# Altium PCB 5811-fail.PcbDoc
Units mm, origin at the board's own origin, x right, y up, seen from the top; angles counter-clockwise.
Board outline 50.17 x 30.35 mm, 4 copper layers (Top Layer, Internal Plane 1, Signal Layer 1, Bottom Layer), stack 0.925 mm thick; 83 components, 54 nets, 244 pads, 321 vias.
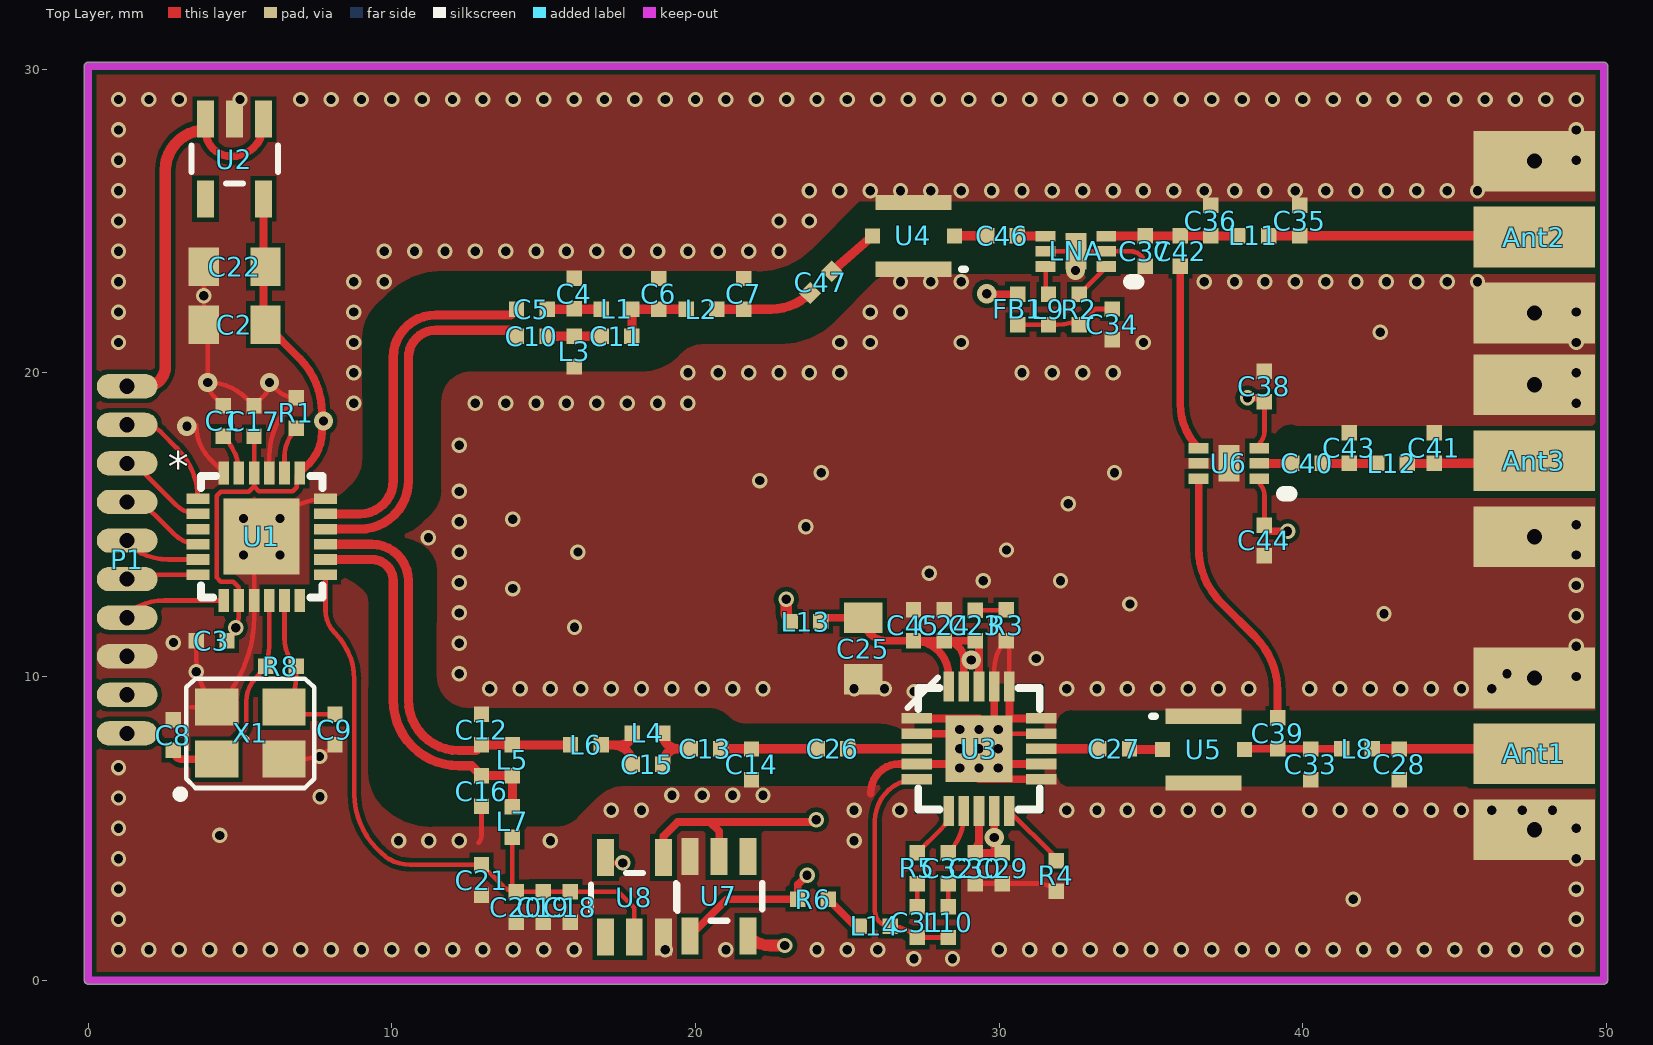
[diagram p0: Top Layer view]
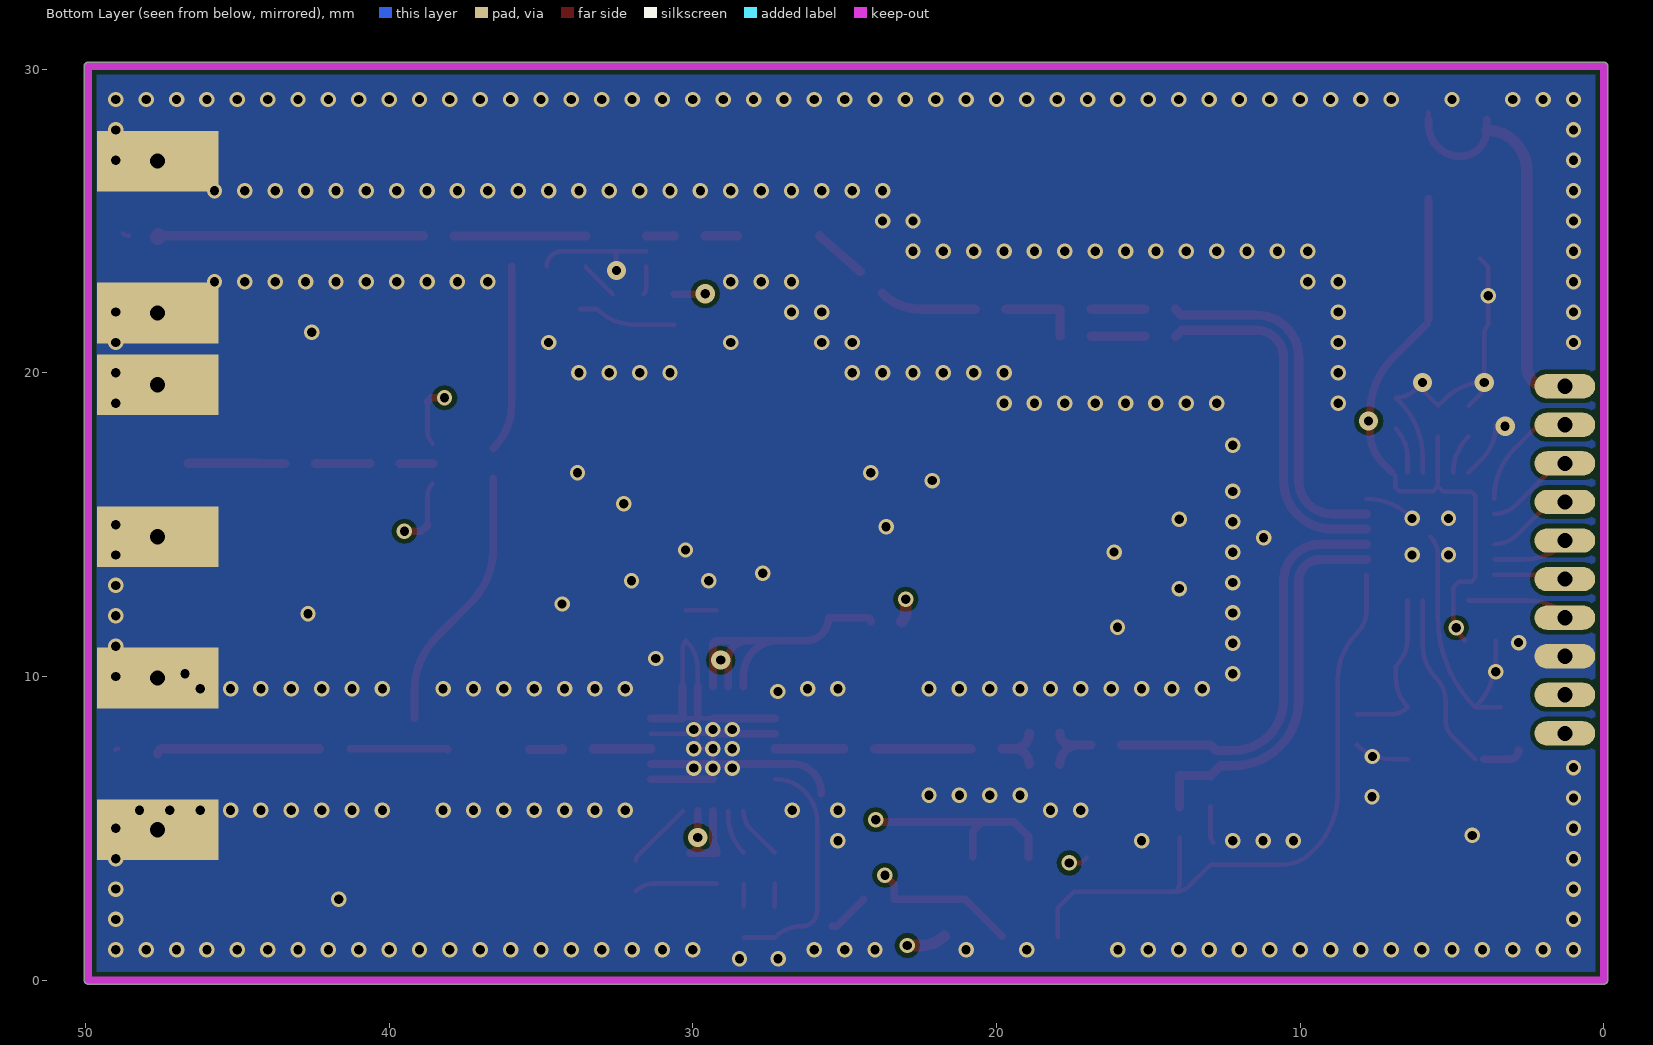
[diagram p1: Bottom Layer view, seen from below]
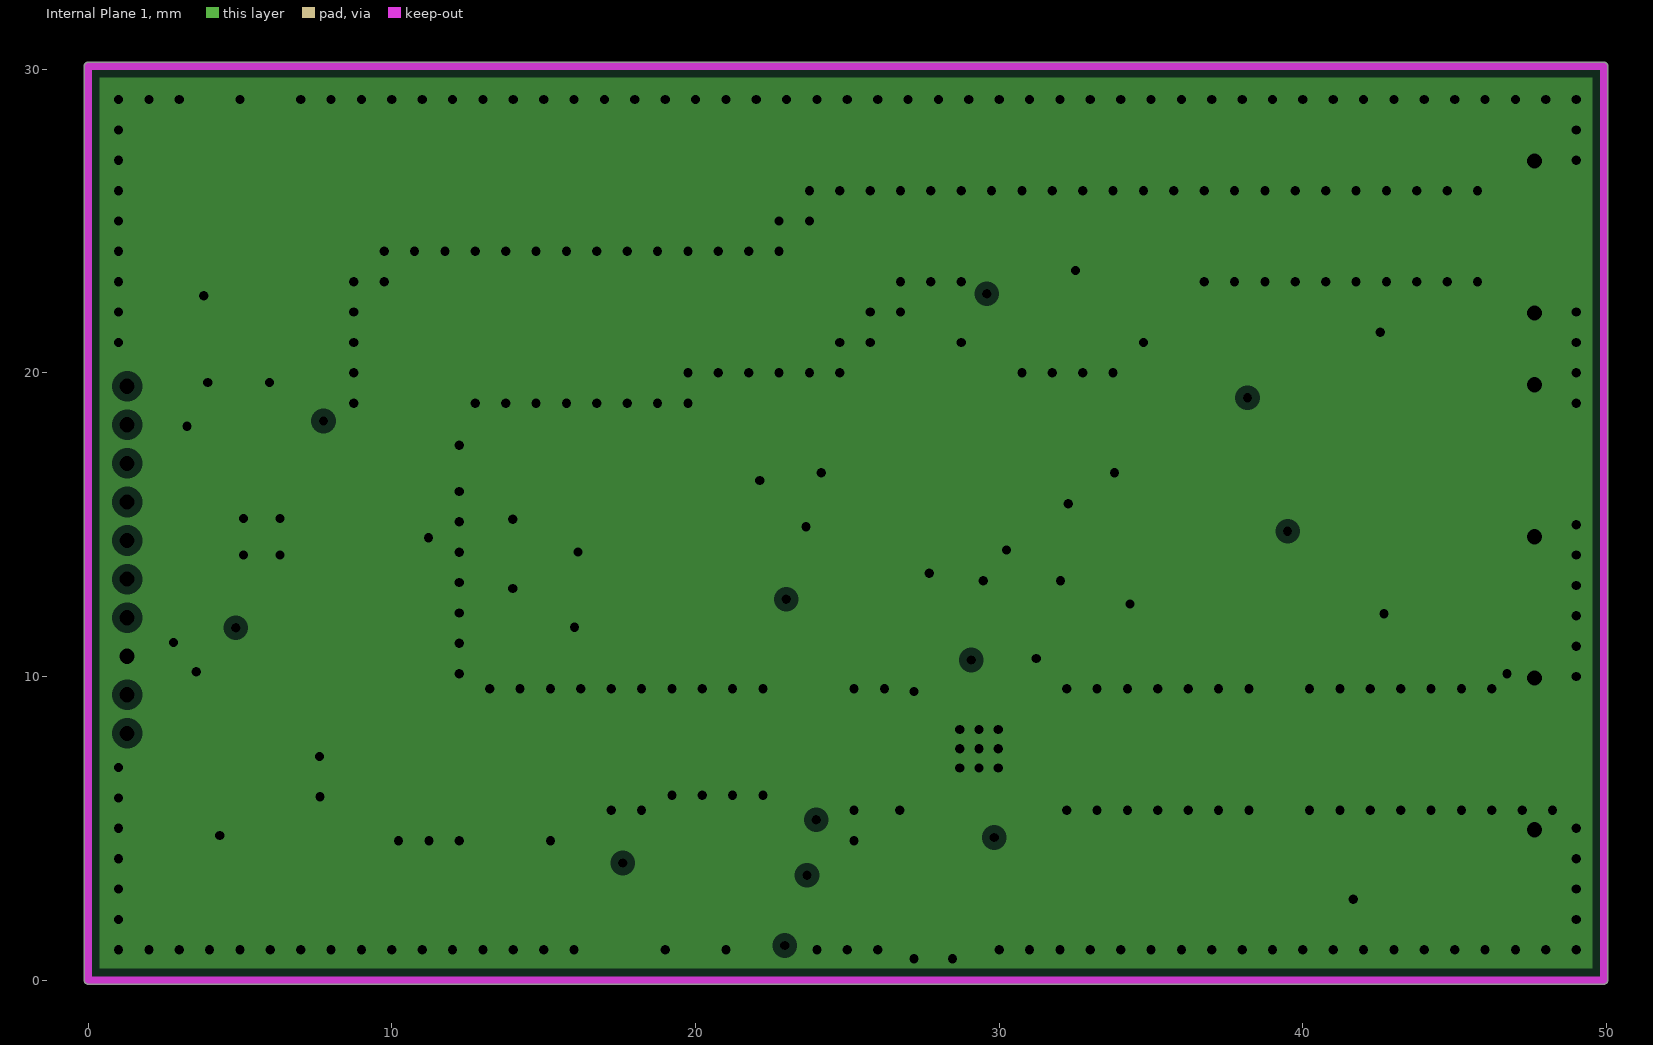
[diagram p2: Internal Plane 1, clearances drawn from the general rule]
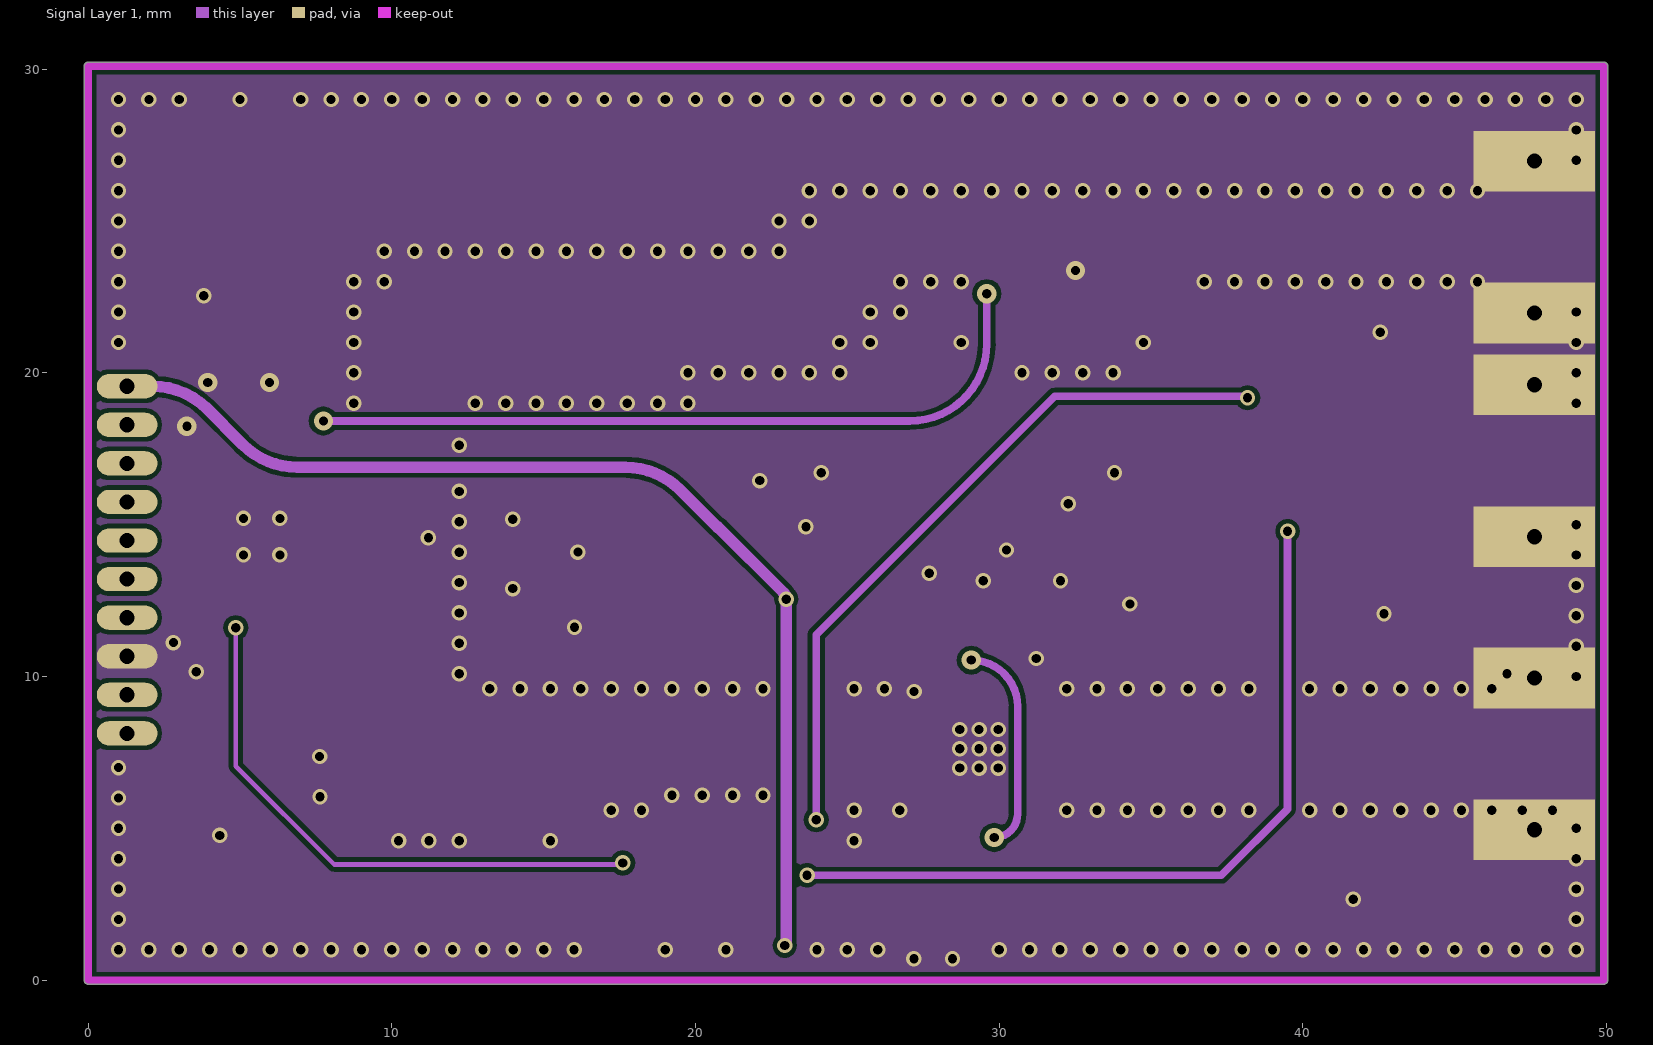
[diagram p3: Signal Layer 1]

## Layer stack, top to bottom
Top Solder: solder mask 0.0102, Solder Resist, Dk 3.5
Top Layer: signal copper 0.0175
Dielectric 1: prepreg 0.195, FR-4, Dk 4.2
Internal Plane 1: plane copper 0.0175, net GND
Dielectric 2: core 0.465, Dk 4.2
Signal Layer 1: signal copper 0.0175
Dielectric 3: prepreg 0.195, Dk 4.2
Bottom Layer: signal copper 0.0175
Bottom Solder: solder mask 0.0102, Solder Resist, Dk 3.5

## Board outline
-0.127,0 ccw(c0,0) 0,-0.127 49.911,-0.127 ccw(c49.911,0) 50.038,0 50.038,30.099 ccw(c49.911,30.099) 49.911,30.226 0,30.226 ccw(c0,30.099) -0.127,30.099

## Design rules (kind name [scope] priority, off if disabled: settings)
Clearance [All] p1: gap=0.152
MinimumSolderMaskSliver [All] p1 off: minsoldermaskwidth=0.254
PlaneClearance [All] p1: clearance=0.254
PlaneConnect [All] p1: planeconnectstyle=Direct reliefexpansion=0.508 reliefentries=4 reliefconductorwidth=0.254 reliefairgap=0.254
PolygonConnect [All] p1: connectstyle=Direct reliefconductorwidth=0.254 reliefentries=4 polygonreliefangle="90 Angle" airgapwidth=0.254
RoomDefinition Switch [InComponentClass('Switch')] p1 off: confinementstyle=ConfineIn formatcopy=TRUE lockcomponents=FALSE outline 87.63,-52.578 220.345,-52.578 220.345,-31.115 87.63,-31.115
RoomDefinition PA_LNA [InComponentClass('PA_LNA')] p2 off: confinementstyle=ConfineIn formatcopy=TRUE lockcomponents=FALSE outline 87.63,-42.799 93.218,-42.799 93.218,-35.179 87.63,-35.179
RoomDefinition BK5811 [InComponentClass('BK5811')] p3 off: confinementstyle=ConfineIn formatcopy=TRUE lockcomponents=FALSE outline 87.63,-52.451 247.65,-52.451 247.65,-44.069 87.63,-44.069
RoutingVias [All] p1: holewidth=0.305 width=0.635 viastyle="Through Hole" minholewidth=0.305 minwidth=0.508 maxholewidth=0.711 maxwidth=1.27
SilkToSilkClearance [All] p1 off: silktosilkclearance=0.254
SilkToSolderMaskClearance [IsPad] p1 off: minsilkscreentomaskgap=0.254 clearancetoexposedcopper=TRUE
SolderMaskExpansion [All] p1: expansion=0.102
UnpouredPolygon [All] p1: allowunpoured=FALSE
Width [All] p1: maxlimit=0.508 minlimit=0.152 preferedwidth=0.254
24 further rules are at their usual default settings.

## Classes and differential pairs
component class BK5811: C1 C2 C3 C4 C5 C6 C7 C8 C9 C10 C11 C12 C13 C14 C15 C16 C17 C18 C19 C20 C21 C22 L1 L2 L3 L4 L5 L6 L7 P1 R1 R8 U1 U2 X1
component class PA_LNA: Ant1 Ant2 C23 C24 C25 C26 C27 C28 C29 C30 C31 C32 C33 C34 C35 C36 C37 C45 C46 C47 FB1 L8 L9 L10 L11 L13 L14 LNA R2 R3 R4 R5 R6 U3 U4 U5 U7 U8
component class Switch: Ant3 C38 C39 C40 C41 C42 C43 C44 L12 U6

## Components (designator, comment, footprint, x,y, rotation, side; value= is the part's Value field where it differs from the comment)
Ant1 "Antenna" SMA 47.625,4.953 r90 top
Ant2 "Antenna" SMA 47.625,21.971 r90 top
Ant3 "Antenna" SMA 47.625,14.605 r90 top
C1 "33nF" 0402 4.445,18.415 r90 top
C2 "22uF" 0805 4.826,21.59 r0 top
C3 "0.1uF" 0402 4.064,11.176 r0 top
C4 "1pF" 0402 16.002,22.606 r90 top
C5 "1pF" 0402 14.605,22.09 r0 top
C6 "NC" 0402 18.796,22.606 r270 top
C7 "NC" 0402 21.59,22.606 r270 top
C8 "Cap" 0402 2.808,8.07 r90 top
C9 "Cap" 0402 8.128,8.255 r270 top
C10 "1pF" 0402 14.605,21.201 r0 top
C11 "1pF" 0402 17.399,21.209 r180 top
C12 "1pF" 0402 12.954,8.255 r270 top
C13 "1pF" 0402 20.32,7.62 r0 top
C14 "1pF" 0402 21.844,7.112 r270 top
C15 "1pF" 0402 18.415,7.112 r0 top
C16 "1pF" 0402 12.954,6.223 r90 top
C17 "0.1uF" 0402 5.461,18.415 r270 top
C18 "1pF" 0402 15.875,2.413 r270 top
C19 "1pF" 0402 14.986,2.413 r270 top
C20 "1pF" 0402 14.097,2.413 r270 top
C21 "1pF" 0402 12.954,3.302 r270 top
C22 "Cap" 0805 4.826,23.495 r180 top
C23 "Cap" 0402 29.21,11.684 r270 top
C24 "Cap" 0402 28.194,11.684 r90 top
C25 "Cap" 0805 25.527,10.922 r90 top
C26 "Cap" 0402 24.511,7.62 r0 top
C27 "Cap" 0402 33.782,7.62 r0 top
C28 "Cap" 0402 43.18,7.112 r270 top
C29 "Cap" 0402 30.099,3.683 r90 top
C30 "Cap" 0402 29.21,3.683 r90 top
C31 "Cap" 0402 27.305,1.905 r90 top
C32 "Cap" 0402 28.321,3.683 r90 top
C33 "Cap" 0402 40.259,7.112 r270 top
C34 "Cap" 0402 33.722,21.594 r90 top
C35 "Cap" 0402 39.894,25.019 r270 top
C36 "Cap" 0402 36.973,25.019 r270 top
C37 "Cap" 0402 34.814,24.003 r90 top
C38 "Cap" 0402 38.735,19.558 r270 top
C39 "Cap" 0402 39.167,8.128 r90 top
C40 "Cap" 0402 40.132,17.018 r0 top
C41 "Cap" 0402 44.323,17.526 r90 top
C42 "Cap" 0402 35.966,24.003 r90 top
C43 "Cap" 0402 41.529,17.526 r90 top
C44 "Cap" 0402 38.735,14.478 r90 top
C45 "Cap" 0402 27.178,11.684 r90 top
C46 "Cap" 0402 30.099,24.511 r180 top
C47 "Cap" 0402 24.13,22.987 r225 top
FB1 "Res2" 0402 30.607,22.09 r270 top
L1 "2nH" 0402 17.399,22.098 r0 top
L2 "0R/10P" 0402 20.193,22.098 r0 top
L3 "2nH" 0402 16.002,20.701 r90 top
L4 "2nH" 0402 18.415,8.128 r0 top
L5 "2nH" 0402 13.97,7.239 r90 top
L6 "2nH" 0402 16.383,7.747 r0 top
L7 "2nH" 0402 13.97,5.207 r90 top
L8 "Inductor" 0402 41.783,7.62 r0 top
L9 "Inductor" 0402 31.623,22.09 r270 top
L10 "Inductor" 0402 28.321,1.905 r90 top
L11 "Inductor" 0402 38.37,24.511 r180 top
L12 "Inductor" 0402 42.926,17.018 r0 top
L13 "Inductor" 0402 23.622,11.811 r0 top
L14 "Inductor" 0402 25.908,1.778 r180 top
LNA "SKY65404-31" SKY65404-31 32.528,24.003 r180 top
P1 "RFInf" RFInf 1.284,19.558 r0 top
R1 "62K 1%" 0402 6.858,18.669 r90 top
R2 "Res2" 0402 32.639,22.09 r270 top
R3 "Res2" 0402 30.226,11.684 r90 top
R4 "Res2" 0402 31.877,3.429 r90 top
R5 "Res2" 0402 27.305,3.683 r90 top
R6 "Res2" 0402 23.876,2.667 r180 top
R8 "Res2" 0402 6.35,10.338 r180 top
U1 "BK5811" BK5811 5.715,14.605 r0 top
U2 "LP5907" SOT23-5 4.826,27.051 r180 top
U3 "SE5004L" SE5004L 29.337,7.62 r0 top
U4 "BF2012" LFB2H5 27.178,24.511 r180 top
U5 "BF2012" LFB2H5 36.728,7.595 r0 top
U6 "SKY13370-374LF" SKY65404-31 37.567,17.018 r180 top
U7 "schmitt_sot23-5" SOT23-5 20.777,2.769 r180 top
U8 "schmitt_sot23-5" SOT23-5 17.983,2.718 r0 top
X1 "16Mhz" OSCILLATOR-3.2X2.5 5.334,8.128 r0 top

## Footprints (in the part's own frame and the unit in brackets; to place one, negate y for a bottom-side part, rotate by r counter-clockwise, add the part's x,y. Pads: shape width x height; smd on the part's side, far side on the other; paste and mask are expansions set on the pad)
0402 [mil] "0402-RES"
  rect 20x20 smd: 1(-19.68,0) 2(20,0)
0805 [mm]
  rect 1x1.27 smd: 1(-1.016,0) 2(1.016,0)
  body extent -1.27,-0.76 1.27,0.76, height 0.8
BK5811 [mm]
  rect 2.5x2.5 smd: 0(0,0)
  rect 0.75x0.35 smd: 1(-2.1,1.25) 2(-2.1,0.75) 3(-2.1,0.25) 4(-2.1,-0.25) 5(-2.1,-0.75) 6(-2.1,-1.25) 13(2.1,-1.25) 14(2.1,-0.75) 15(2.1,-0.25) 16(2.1,0.25) 17(2.1,0.75) 18(2.1,1.25)
  rect 0.35x0.75 smd: 7(-1.25,-2.1) 8(-0.75,-2.1) 9(-0.25,-2.1) 10(0.25,-2.1) 11(0.75,-2.1) 12(1.25,-2.1) 19(1.25,2.1) 20(0.75,2.1) 21(0.25,2.1) 22(-0.25,2.1) 23(-0.75,2.1) 24(-1.25,2.1)
  silkscreen extent -2,-2 2,2
LFB2H5 [mm]
  rect 2.5x0.5 smd: 0(0,1.1) 0(0,-1.1)
  rect 0.5x0.5 smd: 1(-1.35,0) 2(1.35,0)
  silkscreen extent -1.7,1.1 -1.6,1.1, body extent -1.25,-1 1.25,1, height 0.9
OSCILLATOR-3.2X2.5 [mil] "OSCILLATOR-3.2X2.5"
  rect 56x48 smd: 1(-43.31,-33.46) 2(44,-33.46) 3(44,34) 4(-43.31,34)
  silkscreen extent -95,-83 83,71
RFInf [mm]
  oval 2x0.8 hole 0.5: 1(0,0) 2(0,-1.27) 3(0,-2.54) 4(0,-3.81) 5(0,-5.08) 6(0,-6.35) 7(0,-7.62) 8(0,-8.89) 9(0,-10.16) 10(0,-11.43)
SE5004L [mm]
  rect 2.2x2.2 smd: 0(0,0)
  rect 1x0.35 smd: 1(-2.05,1) 2(-2.05,0.5) 3(-2.05,0) 4(-2.05,-0.5) 5(-2.05,-1) 11(2.05,-1) 12(2.05,-0.5) 13(2.05,0) 14(2.05,0.5) 15(2.05,1)
  rect 0.35x1 smd: 6(-1,-2.05) 7(-0.5,-2.05) 8(0,-2.05) 9(0.5,-2.05) 10(1,-2.05) 16(1,2.05) 17(0.5,2.05) 18(0,2.05) 19(-0.5,2.05) 20(-1,2.05)
  silkscreen extent -2.35,-2 2,2.35, body extent -2,-2 2,2, height 0.85
SKY65404-31 [mm]
  rect 0.7x1.2 smd: 0(0,0)
  rect 0.65x0.35 smd: 1(-1,0.5) 2(-1,0) 3(-1,-0.5) 4(1,-0.5) 5(1,0) 6(1,0.5)
  silkscreen extent -2,1 -1.8,1
SMA [mm]
  rect 2x4 smd: 1(2.5,0)
  rect 2x4 hole 0.5: GND(0,0) GND(5,0)
SOT23-5 [mil] "SOT23-5"
  rect 22x48 smd: 1(-37.4,-51.19) 2(0,-51.19) 3(38,-51.19) 4(38,52) 5(-37.4,52)
  silkscreen extent -56,-17 56,32

## Part data
C1 C2 C3 C4 C5 C6 C7 C10 C11 C12 C13 C14 C15 C16 C17 C18 C19 C20 C21: library part Cap, "Capacitor"
C8 C9 C22 C23 C24 C25 C26 C27 C28 C29 C30 C31 C32 C33 C34 C35 C36 C37 C38 C39 C40 C41 C42 C43 C44 C45 C46 C47: "Capacitor"
FB1 R2 R3 R4 R5 R6 R8: "Resistor"
L1 L2 L3 L4 L5 L6 L7: library part Inductor, "Inductor"
R1: library part Res2, "Resistor"
X1: library part OSCILLATOR-3.2X2.5, "Crystal Oscillator in 3.2x2.5 SMD"

## Via types
v1: diameter 0.508/0.508/0.508 (per signal layer), hole 0.305, Top Layer to Bottom Layer, 305 vias
v2: diameter 0.635, hole 0.305, Top Layer to Bottom Layer, 8 vias
v3: diameter 0.508, hole 0.305, Top Layer to Bottom Layer, 8 vias

## Nets (pads, with @x,y where several pads share a name; then routed paths per layer and width w, separated by ;. In a path a pad name is that pad's centre, name@x,y a point inside that pad or via, vN(x,y) a via of type N, cw(c..) or ccw(c..) an arc to the next point about the centre after c; other vN are vias at no path point)
3.3LNA: C34.2 FB1.2 L9.2 R2.2 | length 3.3
  Top Layer w0.152: FB1.2 31.904,21.582 ccw(c31.904,23.357) 33.159,22.102 C34.2
3.3NRF: C2.2 C3.2 C17.2 C22.1 FB1.1 U1.8 U1.19 U1.22 U2.5 U8.5 | length 66.2
  Top Layer w0.152: C17.2 5.465,17.903 U1.22 5.465,16.26 ; C2.2@5.776,21.749 ccw(c6.001,21.749) C2.2 ; U1.19@7.003,16.743 U1.19 6.869,16.609 6.869,16.235 6.735,16.101 5.624,16.101 5.465,16.26 ; U8.5 17.211,3.861 v3(17.602,3.861) ; v3(4.862,11.61) cw(c3.623,12.125) C3.2 4.862,11.466 v3(4.862,11.61) ; v3(4.862,11.61) ccw(c3.623,12.125) 4.965,12.125 U1.8 4.965,12.942 4.781,13.126 4.37,13.126 4.236,13.26 4.236,15.95 4.37,16.084 5.289,16.084 5.465,16.26
  Top Layer w0.254: C2.2@5.776,21.749 U2.5 ; C2.2 6.954,20.478 cw(c5.158,18.682) 7.698,18.682 7.698,18.044 cw(c6.236,18.044) 7.27,17.01 U1.19@7.003,16.743 ; v2(29.591,22.606) 29.591,22.59 FB1.1
  Signal Layer 1 w0.152: v3(4.862,11.61) 4.862,7.05 8.103,3.81 17.551,3.81 v3(17.602,3.861)
  Signal Layer 1 w0.254: v2(7.747,18.415) 27.051,18.415 ccw(c27.051,20.955) 29.591,20.955 v2(29.591,22.606)
5V: L13.1 P1.1 U2.1 U2.3 U7.5 | length 52.1
  Top Layer w0.152: U2.1 U2.1@5.776,28.577
  Top Layer w0.254: U2.3 3.861,27.991 ccw(c4.724,27.991) 4.724,27.127 ccw(c4.724,28.179) 5.776,28.179 U2.1
  Top Layer w0.381: P1.1@1.143,19.558 1.905,19.558 ccw(c1.905,20.193) 2.54,20.193 2.54,26.67 cw(c3.861,26.67) U2.3@3.861,27.991 ; U7.5 ccw(c22.463,2.184) 22.463,1.143 v3(22.936,1.143) ; v3(22.987,12.548) 22.987,12.137 ccw(c23.448,12.137) L13.1
  Signal Layer 1 w0.381: P1.1@1.143,19.558 2.123,19.558 cw(c2.123,17.018) 3.853,18.878 5.096,17.635 ccw(c6.892,19.431) 6.892,16.891 17.693,16.891 cw(c17.693,14.351) 19.489,16.147 20.744,14.892 cw(c20.788,14.935) 20.726,14.935 22.897,12.764 cw(c22.68,12.548) v3(22.987,12.548) 22.987,1.266 cw(c22.814,1.266) v3(22.936,1.143)
CE: P1.2 U1.1 | length 3.9
  Top Layer w0.152: P1.2@1.143,18.288 1.8,18.288 cw(c1.8,17.421) 2.413,18.034 2.924,17.523 cw(c1.256,15.855) U1.1
CSN: P1.3 U1.2 | length 3.1
  Top Layer w0.152: P1.3@1.143,17.018 cw(c1.143,16.098) 1.793,16.749 2.884,15.658 ccw(c3.615,16.388) U1.2
GND: Ant1.GND Ant2.GND Ant3.GND C1.2 C2.1 C3.1 C4.2 C6.1 C7.1 C8.2 C9.2 C12.1 C14.2 C16.1 C17.1 C18.2 C19.2 C20.2 C21.2 C22.2 C24.2 C25.1 C28.2 C29.1 C30.1 C33.2 C34.1 C35.1 C36.1 C37.1 C38.1 C41.2 C43.2 C44.1 C45.2 L3.1 LNA.0 LNA.2 LNA.5 P1.8 R1.2 R3.1 R4.1 U1.0 U1.9 U1.18 U1.21 U1.24 U2.2 U3.0 U3.1 U3.2 U3.4 U3.11 U3.12 U3.14 U3.15 U3.16 U3.17 U4.0 U5.0 U6.0 U6.5 U7.3 U8.3 X1.2 X1.4 | length 60
  Top Layer w0.152: v2(3.251,18.237) 3.505,18.237 3.556,18.288 ccw(c5.183,18.288) 4.033,17.137 U1.24 ; 3.398,8.992 X1.4 ; C3.1 3.564,10.609 ccw(c5.852,10.609) X1.4 ; C22.2@4.082,23.767 C22.2 v1(3.81,22.543) C2.1 cw(c3.503,21.283) 3.937,21.283 v2(3.937,19.685) ; C1.2 4.117,19.251 cw(c4.55,19.685) v2(3.937,19.685) ; U1.0 ccw(c6.319,14.001) 5.465,14.001 U1.9 5.465,11.963 cw(c1.262,11.963) X1.4 ; U1.21 5.965,17.232 cw(c8.505,17.232) 6.709,19.028 R1.2 cw(c6.858,20.097) 6.208,19.446 v2(5.969,19.685) cw(c5.336,19.685) 5.784,19.238 C17.1 5.224,19.152 ccw(c3.937,17.865) v2(3.937,19.685) ; v1(6.315,15.205) 6.364,15.254 cw(c7.815,13.803) U1.18 ; X1.2 6.996,7.278 ccw(c6.996,8.879) C9.2 ; 12.852,4.521 ccw(c12.607,4.766) 12.954,4.766 C16.1 ; C30.1 C29.1 31.264,3.183 cw(c31.264,2.316) R4.1 ; U3.0@29.337,6.62 v1(29.337,6.985) 29.337,7.12 v1(29.337,7.62) ; U3.17 29.837,10.245 cw(c31.165,10.245) R3.1 cw(c29.958,10.916) 30.337,10.916 U3.16 ; U3.0@30.353,8.62 30.337,8.62 U3.0@29.837,8.62 ; U3.14 U3.0@29.837,8.12 ; LNA.5 LNA.0 ; v2(32.512,23.368) 32.528,23.368 LNA.0 ; C37.1 ccw(c34.314,23.503) 34.314,24.003 LNA.2 LNA.0 ; v1(29.337,7.62) 29.837,7.62 U3.0@29.837,8.12 ; v1(29.337,7.62) U3.0@29.337,8.12 ; U3.0@29.337,8.12 U3.0@29.837,8.12 ; U3.0@29.337,8.12 v1(29.337,8.255) 29.337,8.62 U3.0@29.837,8.62 ; U3.0@29.837,8.12 U3.0@29.837,8.62
  Top Layer w0.254: 25.772,6.138 25.772,6.184 cw(c26.708,6.184) 26.708,7.12 U3.4 29.337,7.12 U3.12 ; U3.2 U3.0@29.337,8.12 ; U3.1 U3.0@29.337,8.62 ; U3.0@29.337,6.62 U3.11 ; U3.0@29.837,8.62 U3.17 ; U3.16 30.337,8.62 U3.15
  other v1: 27.192,0.704 28.462,0.704 1,1 2,1 3,1 4,1 5,1 6,1 7,1 8,1 9,1 10,1 11,1 12,1 13,1 14,1 15,1 16,1 19,1 21,1 24,1 25,1 26,1 30,1 31,1 32,1 33,1 34,1 35,1 36,1 37,1 38,1 39,1 40,1 41,1 42,1 43,1 44,1 45,1 46,1 47,1 48,1 49,1 1,2 49,2 41.656,2.667 1,3 49,3 1,4 49,4 10.222,4.594 11.222,4.594 12.222,4.594 15.222,4.594 25.222,4.594 4.332,4.768 1,5 49,5 17.222,5.594 18.222,5.594 25.222,5.594 26.722,5.594 32.222,5.594 33.222,5.594 34.222,5.594 35.222,5.594 36.222,5.594 37.222,5.594 38.222,5.594 40.222,5.594 41.222,5.594 42.222,5.594 43.222,5.594 44.222,5.594 45.222,5.594 46.222,5.594 47.222,5.594 48.222,5.594 1,6 7.634,6.038 19.222,6.094 20.222,6.094 21.222,6.094 22.222,6.094 28.702,6.985 29.972,6.985 1,7 7.62,7.366 28.702,7.62 29.972,7.62 28.702,8.255 29.972,8.255 27.198,9.507 13.222,9.594 14.222,9.594 15.222,9.594 16.222,9.594 17.222,9.594 18.222,9.594 19.222,9.594 20.222,9.594 21.222,9.594 22.222,9.594 25.222,9.594 26.222,9.594 32.222,9.594 33.222,9.594 34.222,9.594 35.222,9.594 36.222,9.594 37.222,9.594 38.222,9.594 40.222,9.594 41.222,9.594 42.222,9.594 43.222,9.594 44.222,9.594 45.222,9.594 46.222,9.594 49,10 12.222,10.094 46.722,10.094 3.556,10.16 31.222,10.594 49,11 12.222,11.094 2.808,11.118 16.016,11.626 49,12 42.672,12.065 12.222,12.094 34.304,12.388 13.984,12.896 49,13 12.222,13.094 29.478,13.15 32.018,13.15 27.7,13.404 5.115,14.005 6.315,14.005 49,14 12.222,14.094 16.129,14.097 30.24,14.166 11.206,14.57 23.636,14.928 49,15 12.222,15.094 13.984,15.182 5.115,15.205 32.272,15.69 12.222,16.094 22.112,16.452 24.144,16.706 33.796,16.706 12.222,17.618 8.75,19 12.75,19 13.75,19 14.75,19 15.75,19 16.75,19 17.75,19 18.75,19 19.75,19 49,19 8.75,20 19.75,20 20.75,20 21.75,20 22.75,20 23.75,20 24.75,20 30.75,20 31.75,20 32.75,20 33.75,20 49,20 1,21 8.75,21 24.75,21 25.75,21 28.75,21 34.75,21 49,21 42.545,21.336 1,22 8.75,22 25.75,22 26.75,22 49,22 1,23 8.75,23 9.75,23 26.75,23 27.75,23 28.75,23 36.75,23 37.75,23 38.75,23 39.75,23 40.75,23 41.75,23 42.75,23 43.75,23 44.75,23 45.75,23 1,24 9.75,24 10.75,24 11.75,24 12.75,24 13.75,24 14.75,24 15.75,24 16.75,24 17.75,24 18.75,24 19.75,24 20.75,24 21.75,24 22.75,24 1,25 22.75,25 23.75,25 1,26 23.75,26 24.75,26 25.75,26 26.75,26 27.75,26 28.75,26 29.75,26 30.75,26 31.75,26 32.75,26 33.75,26 34.75,26 35.75,26 36.75,26 37.75,26 38.75,26 39.75,26 40.75,26 41.75,26 42.75,26 43.75,26 44.75,26 45.75,26 1,27 49,27 1,28 49,28 1,29 2,29 3,29 5,29 7,29 8,29 9,29 10,29 11,29 12,29 13,29 14,29 15,29 16,29 17,29 18,29 19,29 20,29 21,29 22,29 23,29 24,29 25,29 26,29 27,29 28,29 29,29 30,29 31,29 32,29 33,29 34,29 35,29 36,29 37,29 38,29 39,29 40,29 41,29 42,29 43,29 44,29 45,29 46,29 47,29 48,29 49,29
IRQ: P1.7 U1.7 | length 3.5
  Top Layer w0.152: P1.7@1.143,11.938 cw(c2.512,10.569) 2.512,12.505 U1.7
MISO: P1.6 U1.6 | length 2.5
  Top Layer w0.152: P1.6@1.143,13.208 cw(c1.498,12.853) 1.498,13.355 U1.6
MOSI: P1.5 U1.5 | length 2.6
  Top Layer w0.152: P1.5@1.143,14.478 ccw(c2.647,15.982) 2.647,13.855 U1.5
NetAnt1_1: Ant1.1 C28.1 L8.2 | length 5.5
  Top Layer w0.152: Ant1.1@48.925,7.62 cw(c48.925,7.483) Ant1.1@49.022,7.58
  Top Layer w0.305: L8.2 47.458,7.62 cw(c47.458,7.453) Ant1.1
NetAnt2_1: Ant2.1 C35.2 L11.1 | length 9
  Top Layer w0.152: Ant2.1@48.558,24.511 ccw(c48.558,24.808) Ant2.1@48.768,24.598
  Top Layer w0.305: L11.1 C35.2 Ant2.1@47.585,24.511
  Top Layer w0.508: Ant2.1@47.585,24.511 Ant2.1
NetAnt3_1: Ant3.1 C41.1 L12.2 | length 3.2
  Top Layer w0.305: L12.2 44.323,17.018 C41.1 Ant3.1@46.623,17.026
NetC1_1: C1.1 U1.23 | length 1.4
  Top Layer w0.152: C1.1 4.477,17.883 cw(c3.299,16.705) U1.23
NetC4_1: C4.1 C5.2 L1.1 | length 1.8
  Top Layer w0.152: L1.1@16.891,22.09 L1.1
  Top Layer w0.305: C5.2 L1.1@16.891,22.09
NetC5_1: C5.1 U1.17 | length 11.8
  Top Layer w0.305: U1.17 8.95,15.355 ccw(c8.95,16.452) 10.047,16.452 10.047,20.508 cw(c11.444,20.508) 11.444,21.905 13.92,21.905 C5.1
NetC6_2: C6.2 C11.1 L1.2 L2.1 | length 2.7
  Top Layer w0.152: L1.2@17.899,22.09 L1.2
  Top Layer w0.305: C11.1 17.907,21.217 L1.2 C6.2 L2.1
NetC7_2: C7.2 C47.2 L2.2 | length 3.2
  Top Layer w0.305: L2.2 C7.2 22.492,22.098 ccw(c22.492,23.907) C47.2
NetC8_1: C8.1 R8.2 U1.10 X1.1 | length 7.1
  Top Layer w0.152: X1.1 5.025,8.069 ccw(c4.584,8.509) 5.207,8.509 5.207,9.178 cw(c6.316,9.178) 5.532,9.962 ccw(c4.486,11.008) 5.965,11.008 U1.10
  Top Layer w0.254: C8.1 ccw(c3.1,7.57) 3.1,7.278 X1.1@3.951,7.278
NetC9_1: C9.1 R8.1 U1.11 X1.3 | length 5.5
  Top Layer w0.152: X1.3@6.465,9.024 cw(c6.419,9.024) X1.3 ; U1.11 6.465,11.267 ccw(c7.779,11.267) R8.1 6.85,9.953 cw(c5.49,9.953) X1.3 ; C9.1 7.023,8.755 cw(c7.023,9.563) X1.3
NetC10_1: C10.1 U1.16 | length 11.9
  Top Layer w0.305: U1.16 8.95,14.855 ccw(c8.95,16.452) 10.547,16.452 10.547,20.508 cw(c11.444,20.508) 11.444,21.405 13.901,21.405 C10.1
NetC10_2: C10.2 C11.2 L3.2 | length 1.8
  Top Layer w0.152: C11.2@16.883,21.201 C11.2
  Top Layer w0.305: C10.2 C11.2@16.883,21.201
NetC12_2: C12.2 L5.2 L6.1 U1.15 | length 13.7
  Top Layer w0.152: C12.2@12.878,7.671 C12.2
  Top Layer w0.305: U1.15 9.342,14.355 cw(c9.342,13.15) 10.547,13.15 10.547,9.221 ccw(c12.206,9.221) 12.206,7.562 12.769,7.562 C12.2@12.878,7.671 ; C12.2 L5.2 L6.1
NetC13_1: C13.1 C15.2 L4.2 | length 2
  Top Layer w0.305: C15.2 cw(c19.431,7.112) 19.431,7.62 ; L4.2 ccw(c19.431,8.128) 19.431,7.62 ; C13.1 19.431,7.62
NetC13_2: C13.2 C14.1 C26.1 | length 3.2
  Top Layer w0.305: C13.2 C26.1
NetC15_1: C15.1 L4.1 L6.2 | length 2.2
  Top Layer w0.305: L6.2 17.28,7.747 ; C15.1 ccw(c17.28,7.112) 17.28,7.747 ; L4.1 cw(c17.534,8.128) 17.534,7.747 17.28,7.747
NetC16_2: C16.2 L5.1 L7.2 U1.14 | length 12.9
  Top Layer w0.152: C16.2@12.878,6.807 C16.2 ; L5.1@13.962,6.731 L5.1
  Top Layer w0.305: U1.14 9.342,13.855 cw(c9.342,13.15) 10.047,13.15 10.047,9.221 ccw(c12.206,9.221) 12.206,7.062 12.623,7.062 C16.2@12.878,6.807 ; C16.2 12.954,6.739 L5.1 L7.2
NetC18_1: C18.1 C19.1 C20.1 C21.1 L7.1 U1.13 U8.2 | length 21.5
  Top Layer w0.152: U1.13 7.815,12.186 ccw(c8.884,12.186) 8.128,11.43 cw(c6.595,9.897) 8.763,9.897 8.763,6.132 ccw(c11.303,6.132) 9.507,4.336 9.652,4.191 ccw(c10.591,5.13) 10.591,3.802 C21.1 13.663,3.093 ccw(c14.097,3.526) C20.1 ; L7.1 13.97,3.22 ccw(c14.404,3.22) C20.1 ; U8.2 17.983,2.388 17.458,2.913 C18.1 C19.1 C20.1
NetC23_1: C23.1 R3.2 | length 1
  Top Layer w0.152: C23.1 30.218,12.184 R3.2
NetC26_2: C26.2 U3.3 | length 2.3
  Top Layer w0.305: C26.2 U3.3
NetC27_1: C27.1 U3.13 | length 1.9
  Top Layer w0.305: U3.13 C27.1
NetC27_2: C27.2 U5.1 | length 1.1
  Top Layer w0.305: C27.2 ccw(c34.315,7.62) 34.315,7.595 U5.1
NetC31_2: C31.2 R5.1 | length 0.8
  Top Layer w0.152: C31.2 R5.1
NetC32_1: C32.1 L10.2 | length 0.8
  Top Layer w0.152: L10.2 C32.1
NetC32_2: C32.2 U3.7 | length 1.5
  Top Layer w0.152: C32.2 ccw(c27.075,5.437) 28.837,5.437 U3.7
NetC33_1: C33.1 C39.1 L8.1 U5.2 | length 3.2
  Top Layer w0.254: U5.2 cw(c38.104,7.595) 38.104,7.62 L8.1
NetC36_2: C36.2 C37.2 C42.2 L11.2 LNA.3 | length 4.3
  Top Layer w0.152: L11.2@37.854,24.503 L11.2
  Top Layer w0.305: LNA.3 L11.2@37.854,24.503
NetC38_2: C38.2 U6.3 U7.2 U8.4 | length 32.8
  Top Layer w0.152: U6.3@38.562,17.668 ccw(c38.144,18.086) 38.735,18.086 C38.2
  Top Layer w0.254: U8.4 18.948,4.75 19.406,5.207 20.472,5.207 ; U7.2 20.777,4.902 20.472,5.207 ; v3(23.978,5.283) 23.901,5.207 20.472,5.207 ; v3(38.176,19.177) 38.608,19.177 C38.2
  Signal Layer 1 w0.254: v3(23.978,5.283) 23.978,11.379 31.826,19.228 38.125,19.228 v3(38.176,19.177)
NetC39_2: C39.2 U6.6 | length 8.7
  Top Layer w0.254: U6.6 36.567,14.226 ccw(c39.107,14.226) 37.311,12.429 38.423,11.317 cw(c36.627,9.521) 39.167,9.521 C39.2
NetC40_1: C40.1 U6.2 | length 1.1
  Top Layer w0.305: U6.2 C40.1
NetC40_2: C40.2 C43.1 L12.1 | length 1.8
  Top Layer w0.305: C40.2 L12.1
NetC42_1: C42.1 U6.4 | length 6.1
  Top Layer w0.254: C42.1 35.966,18.967 ccw(c38.016,18.967) U6.4
NetC44_2: C44.2 R6.2 U6.1 U7.4 | length 33.1
  Top Layer w0.152: U6.1@38.562,16.368 cw(c38.144,15.95) 38.735,15.95 C44.2
  Top Layer w0.254: U7.4 21.031,2.667 R6.2 23.368,3.15 v3(23.673,3.454) ; C44.2 38.938,14.783 v3(39.497,14.783)
  Signal Layer 1 w0.254: v3(23.673,3.454) 37.313,3.454 39.497,5.639 v3(39.497,14.783)
NetC46_1: C46.1 LNA.4 | length 0.9
  Top Layer w0.152: LNA.4@31.52,24.511 LNA.4
  Top Layer w0.305: C46.1 30.599,24.503 LNA.4
NetC46_2: C46.2 U4.1 | length 1.1
  Top Layer w0.305: U4.1 C46.2
NetC47_1: C47.1 U4.2 | length 1.8
  Top Layer w0.305: C47.1 U4.2
NetL9_1: L9.1 LNA.6 | length 0.9
  Top Layer w0.152: LNA.6 31.528,22.819 ccw(c31.852,22.819) L9.1
NetL14_2: L14.2 R6.1 | length 1.4
  Top Layer w0.254: R6.1 25.265,1.778 L14.2
NetLNA_1: LNA.1 R2.1 | length 1.3
  Top Layer w0.152: R2.1 33.511,23.462 ccw(c33.47,23.503) LNA.1
NetR1_1: R1.1 U1.20 | length 1.6
  Top Layer w0.152: U1.20 6.465,17.22 cw(c7.807,17.22) R1.1
NetR4_2: R4.2 U3.10 | length 2.3
  Top Layer w0.152: U3.10 31.811,4.096 cw(c31.652,3.937) R4.2
NetR5_2: R5.2 U3.6 | length 1.8
  Top Layer w0.152: R5.2 28.092,4.978 ccw(c27.499,5.57) U3.6
SCK: P1.4 U1.4 | length 2.9
  Top Layer w0.152: P1.4@1.143,15.748 cw(c1.143,14.215) 2.227,15.299 2.857,14.669 ccw(c3.615,15.427) U1.4
VPA: C23.2 C24.1 C25.2 C29.2 C30.2 C45.1 L13.2 U3.8 U3.9 U3.18 U3.19 U3.20 | length 22.6
  Top Layer w0.152: C45.1 C45.1@27.186,11.176 ; C24.1 28.202,11.176 C24.1@28.221,11.157
  Top Layer w0.254: L13.2 cw(c24.257,11.811) 24.257,11.938 C25.2 ccw(c26.289,11.938) 26.289,11.176 27.186,11.176 C45.1@27.314,11.176 ; C45.1 cw(c27.178,10.025) C45.1@27.314,11.176 ; C24.1 cw(c28.194,10.541) C24.1@28.295,11.176 ; U3.20 28.337,10.025 ccw(c27.178,10.025) C45.1@27.314,11.176 ; U3.19 28.837,10.541 ccw(c28.194,10.541) C24.1@28.295,11.176 ; C30.2@29.337,4.318 cw(c29.21,4.318) C30.2 ; U3.8 29.337,4.527 ccw(c29.718,4.191) C30.2 ; U3.18 29.337,11.049 ccw(c29.21,11.049) C23.2 C24.1@28.295,11.176 ; v2@29.718,4.699 v2(29.837,4.699) ; U3.9 v2(29.837,4.699) ; C45.1@27.314,11.176 28.202,11.176 C24.1@28.295,11.176 ; C30.2 C29.2 cw(c30.099,4.453) 29.837,4.453 v2(29.837,4.699)
  Signal Layer 1 w0.254: v2(29.083,10.541) cw(c29.083,9.017) 30.607,9.017 30.607,5.469 cw(c29.837,5.469) v2(29.837,4.699)
VREF: C31.1 L10.1 L14.1 U3.5 | length 7.9
  Top Layer w0.152: U3.5 ccw(c27.287,5.241) 25.908,5.241 25.908,2.278 ccw(c26.408,2.278) L14.1 cw(c26.408,0.513) 27.303,1.407 C31.1 L10.1
pads on no net: P1.9 P1.10 U1.3 U1.12 U2.4 U7.1 U8.1

## Polygon pours and split planes (outlines as drawn)
GND on Top Layer "Top Layer-No Net" (solid, remove dead copper, pour order 2): 0,30.099 49.911,30.099 49.911,-0.138 0,-0.138 cw(c0,0) -0.138,0
GND on Bottom Layer "Top Layer-No Net" (solid, remove dead copper, pour order 3): -0.049,30.217 0.069,30.099 49.911,30.099 49.911,0 0,0
GND on Signal Layer 1 "Top Layer-No Net" (solid, remove dead copper, pour order 5): 0,30.099 49.911,30.099 49.911,0 0,0
GND on Internal Plane 1 (split plane): 49.528,0.383 0.383,0.383 0.383,29.716 49.528,29.716

## Keep-outs
Keep-Out Layer:
  lines w0.254: 0,0 49.911,0 49.911,30.099 0,30.099 0,0

## Other copper
Top Layer:
  pour cut-out: 25.4,25.654 49.911,25.654 49.911,23.241 25.4,23.241
  pour cut-out: 27.198,9.779 31.496,9.779 31.496,5.461 27.198,5.461
  pour cut-out: 27.229,7.925 ccw(c25.941,6.637) 25.941,8.458 21.659,8.458 cw(c21.659,9.239) 21.107,8.687 ccw(c20.433,8.012) 20.433,8.966 12.583,8.966 cw(c12.583,10.094) 11.786,9.296 cw(c12.521,10.032) 11.481,10.032 11.481,13.535 ccw(c10.614,13.535) 11.227,14.148 ccw(c10.123,13.044) 10.123,14.605 8.062,14.605 cw(c8.062,14.844) 7.893,14.675 ccw(c8.081,14.487) 7.815,14.487 7.815,13.355 7.829,13.355 cw(c7.829,11.639) 9.042,12.852 cw(c8.613,12.423) 9.22,12.423 9.22,6.844 ccw(c10.781,6.844) 9.677,5.74 ccw(c11.333,7.396) 11.333,5.055 15.418,5.055 ccw(c15.418,6.036) 16.112,5.342 16.789,6.02 cw(c17.709,5.1) 17.709,6.401 25.551,6.401 ccw(c25.551,8.856) 27.287,7.12
  pour cut-out: 25.4,25.654 23.833,24.087 cw(c22.036,25.883) 22.036,23.343 11.644,23.343 ccw(c11.644,20.803) 9.848,22.599 9.449,22.2 ccw(c10.491,21.157) 9.017,21.157 9.017,17.191 cw(c7.803,17.191) 8.661,16.332 8.445,16.116 cw(c7.815,16.746) 7.815,15.855 7.815,14.931 ccw(c8.277,14.931) 7.95,14.605 cw(c8.012,14.544) 8.012,14.63 9.957,14.63 ccw(c9.957,16.102) 10.997,15.061 11.303,15.367 ccw(c10.506,16.164) 11.633,16.164 11.633,19.025 cw(c12.674,19.025) 11.938,19.761 cw(c12.613,19.087) 12.613,20.041 18.237,20.041 ccw(c18.237,21.696) 19.408,20.526 19.482,20.599 cw(c20.34,19.741) 20.34,20.955 22.798,20.955 ccw(c22.798,23.495) 24.595,21.699 25.939,23.043 cw(c26.416,22.566) 26.416,23.241
  pour cut-out: 49.911,6.375 32.226,6.375 cw(c32.385,6.858) 31.877,6.858 31.877,8.382 cw(c32.385,8.382) 32.385,8.89 49.911,8.89
  pour cut-out: 49.911,18.263 39.802,18.263 ccw(c39.624,17.653) 38.989,17.653 38.989,16.256 ccw(c39.37,16.256) 39.37,15.875 49.911,15.875

## Silkscreen, mask and mechanical layers (free items; w line width, h text height)
Bottom Solder:
  rectangle: 24.906,5.276 33.542,9.848

## Text inside footprints (layer, text, board x,y; h text height)
U1: Top Overlay "*" at 2.615,16.405 h1.02